# EAGLE board GP STM32F407.01 (EAGLE 7.1.0)
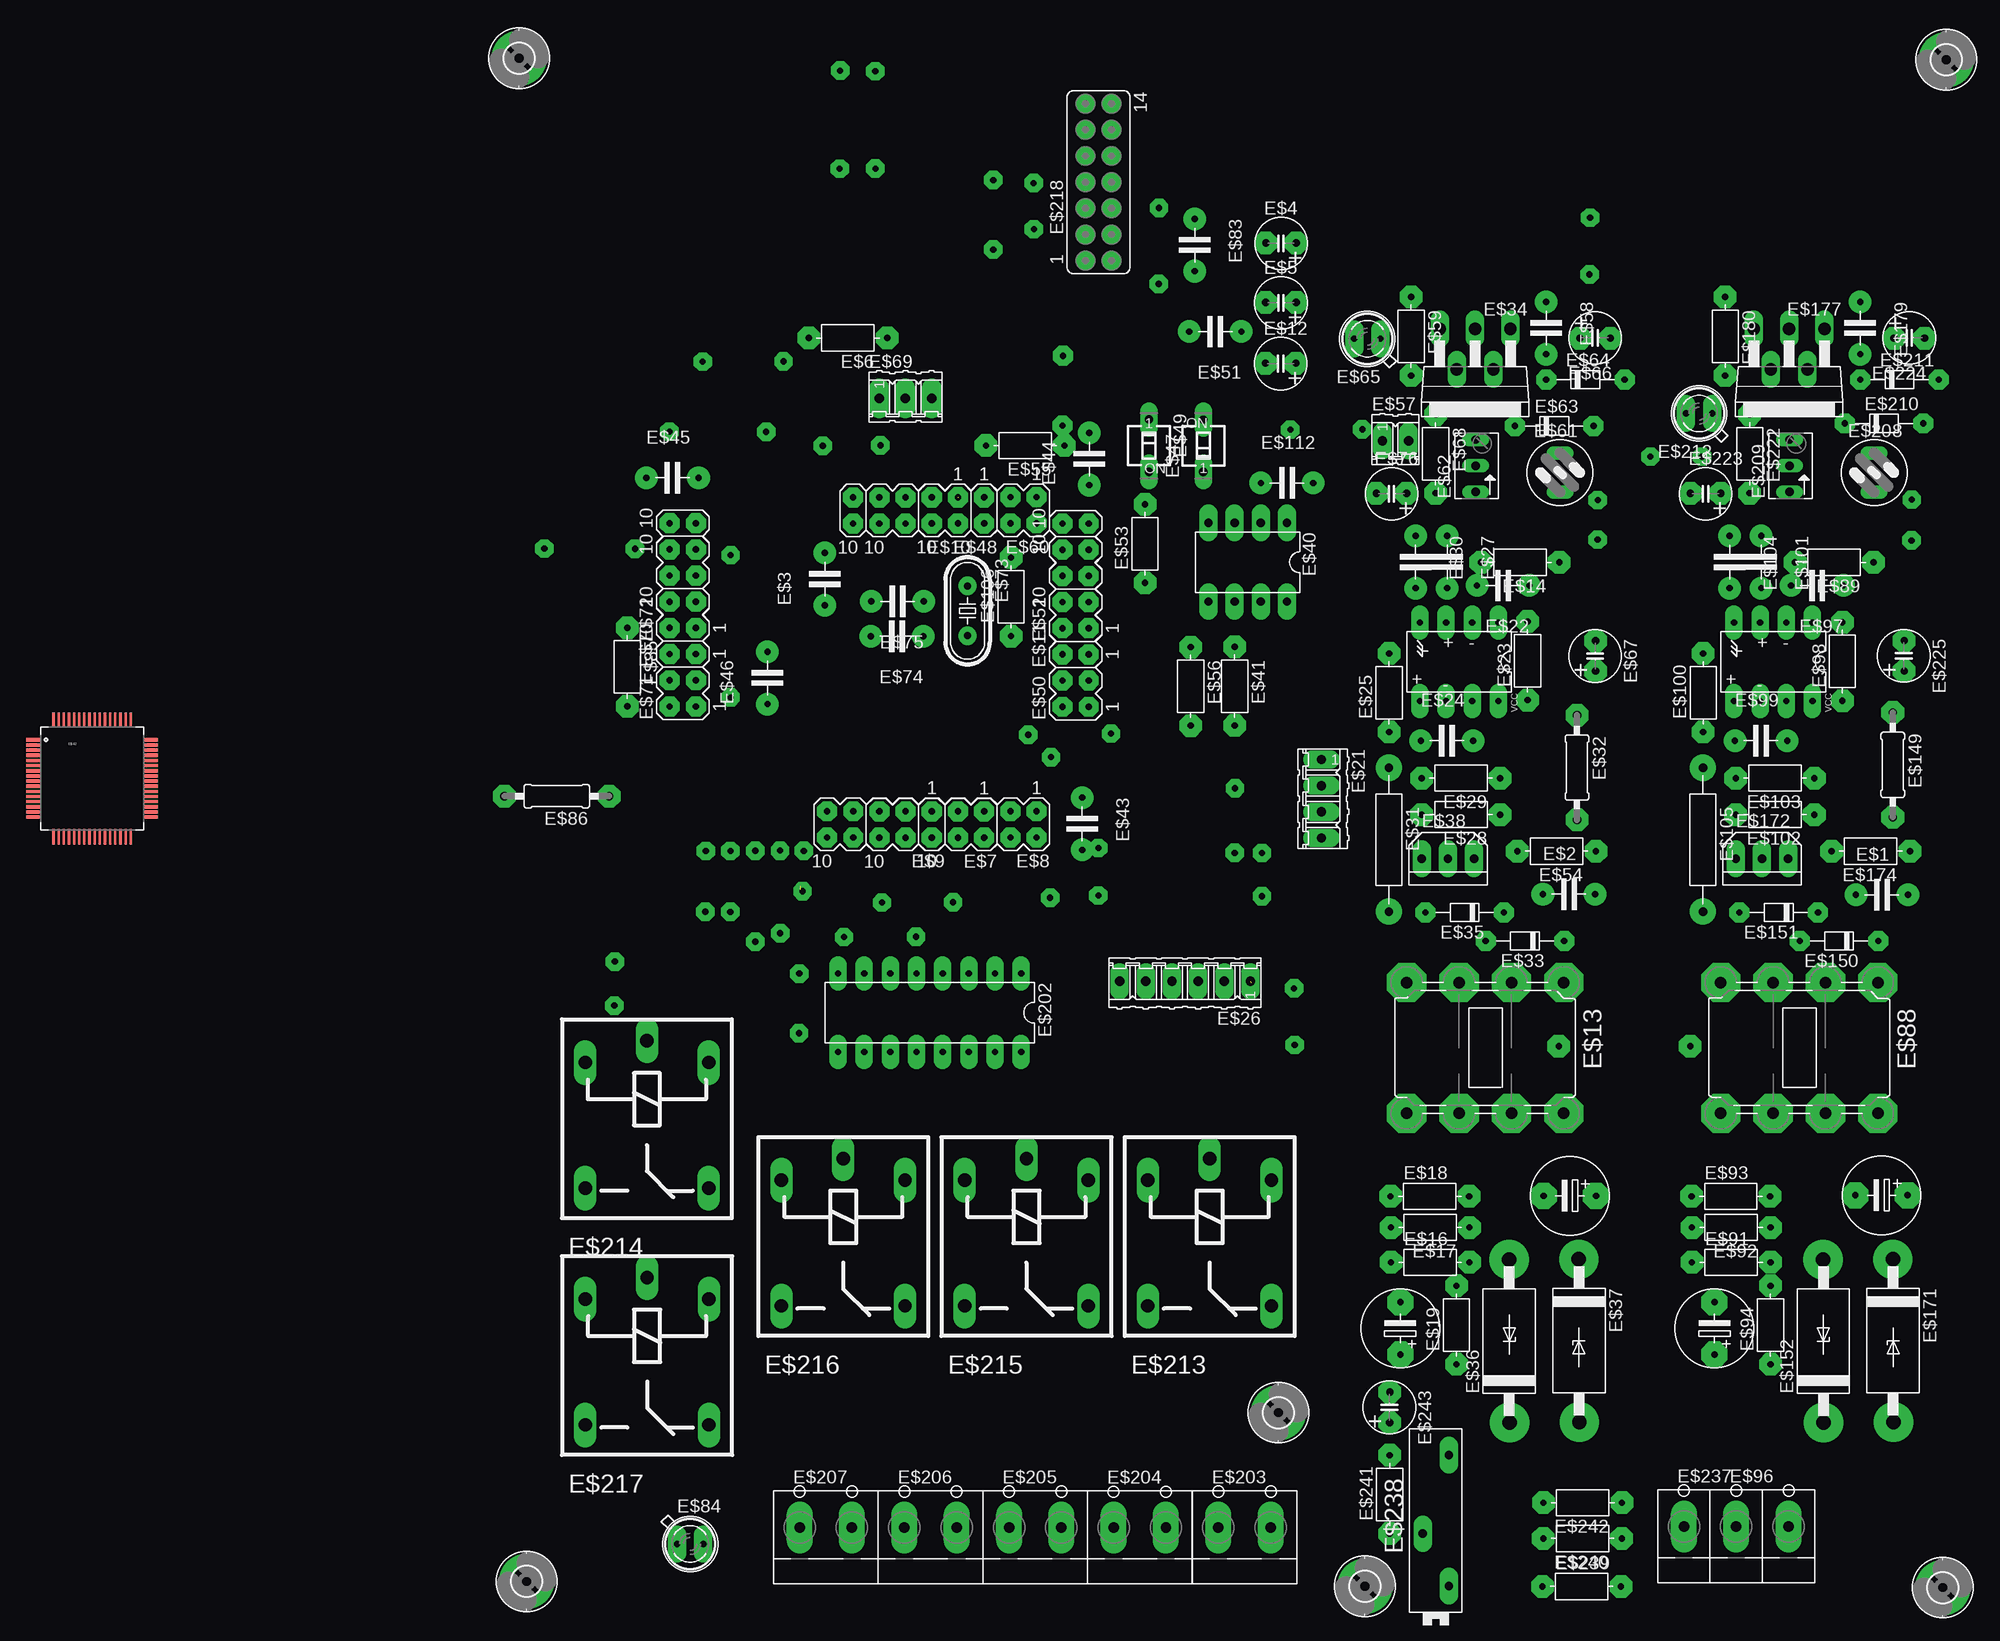
[diagram p0: board, top side]
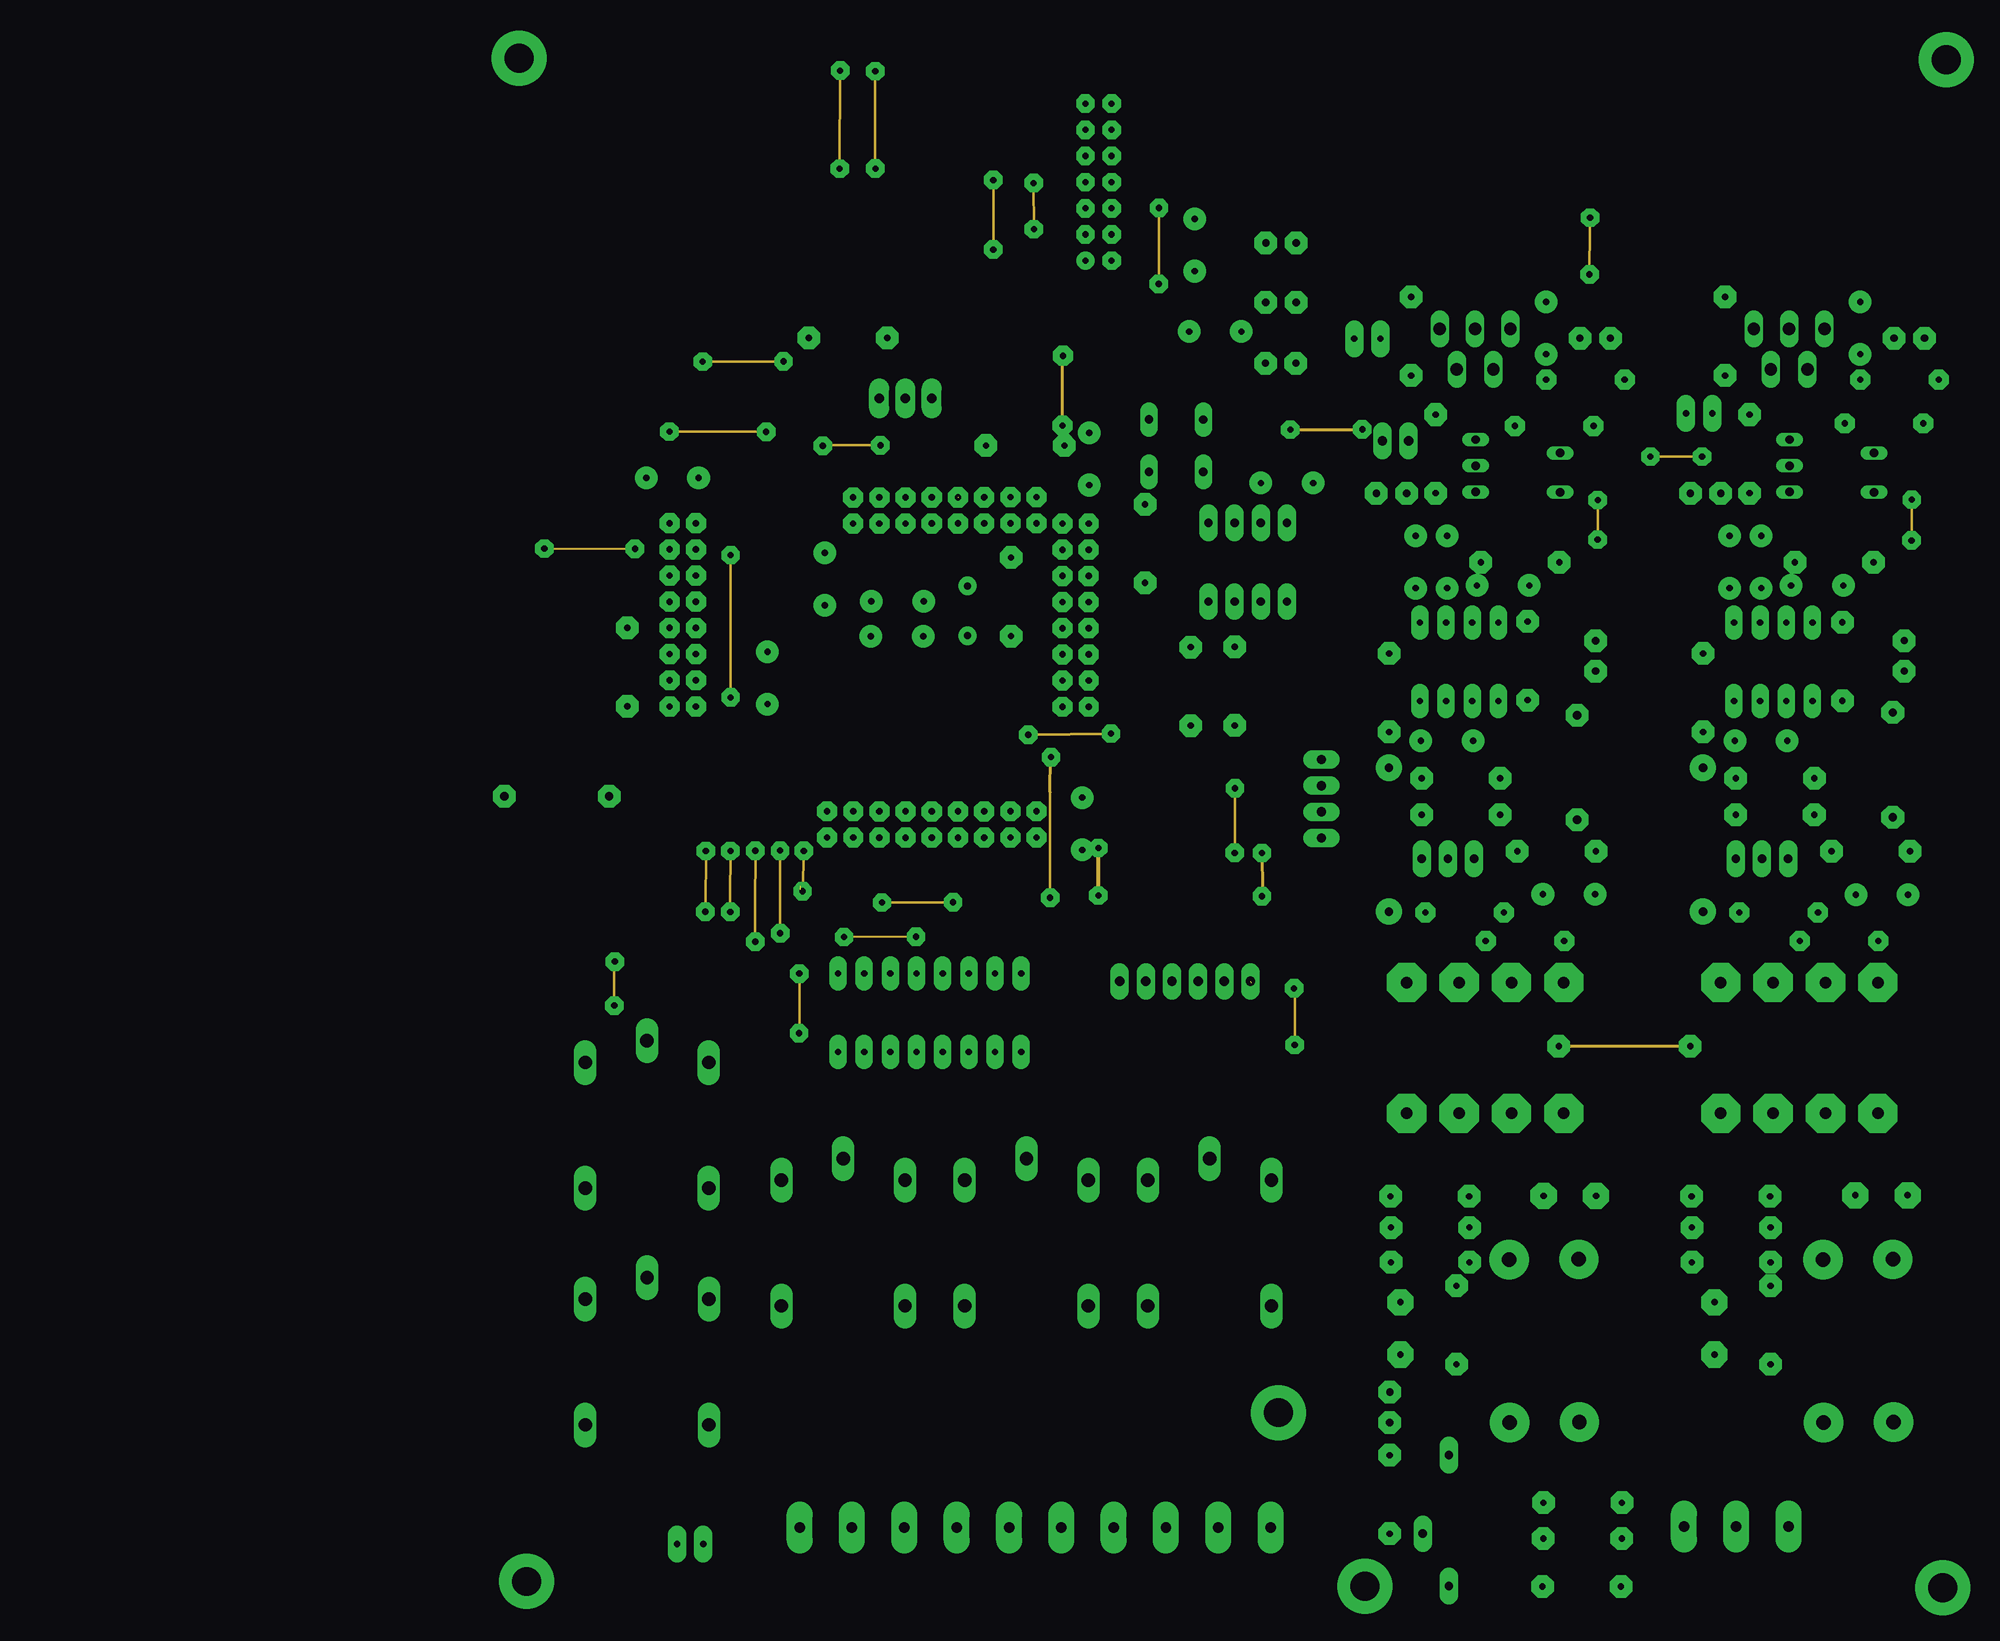
[diagram p1: board, inner layer Route4]
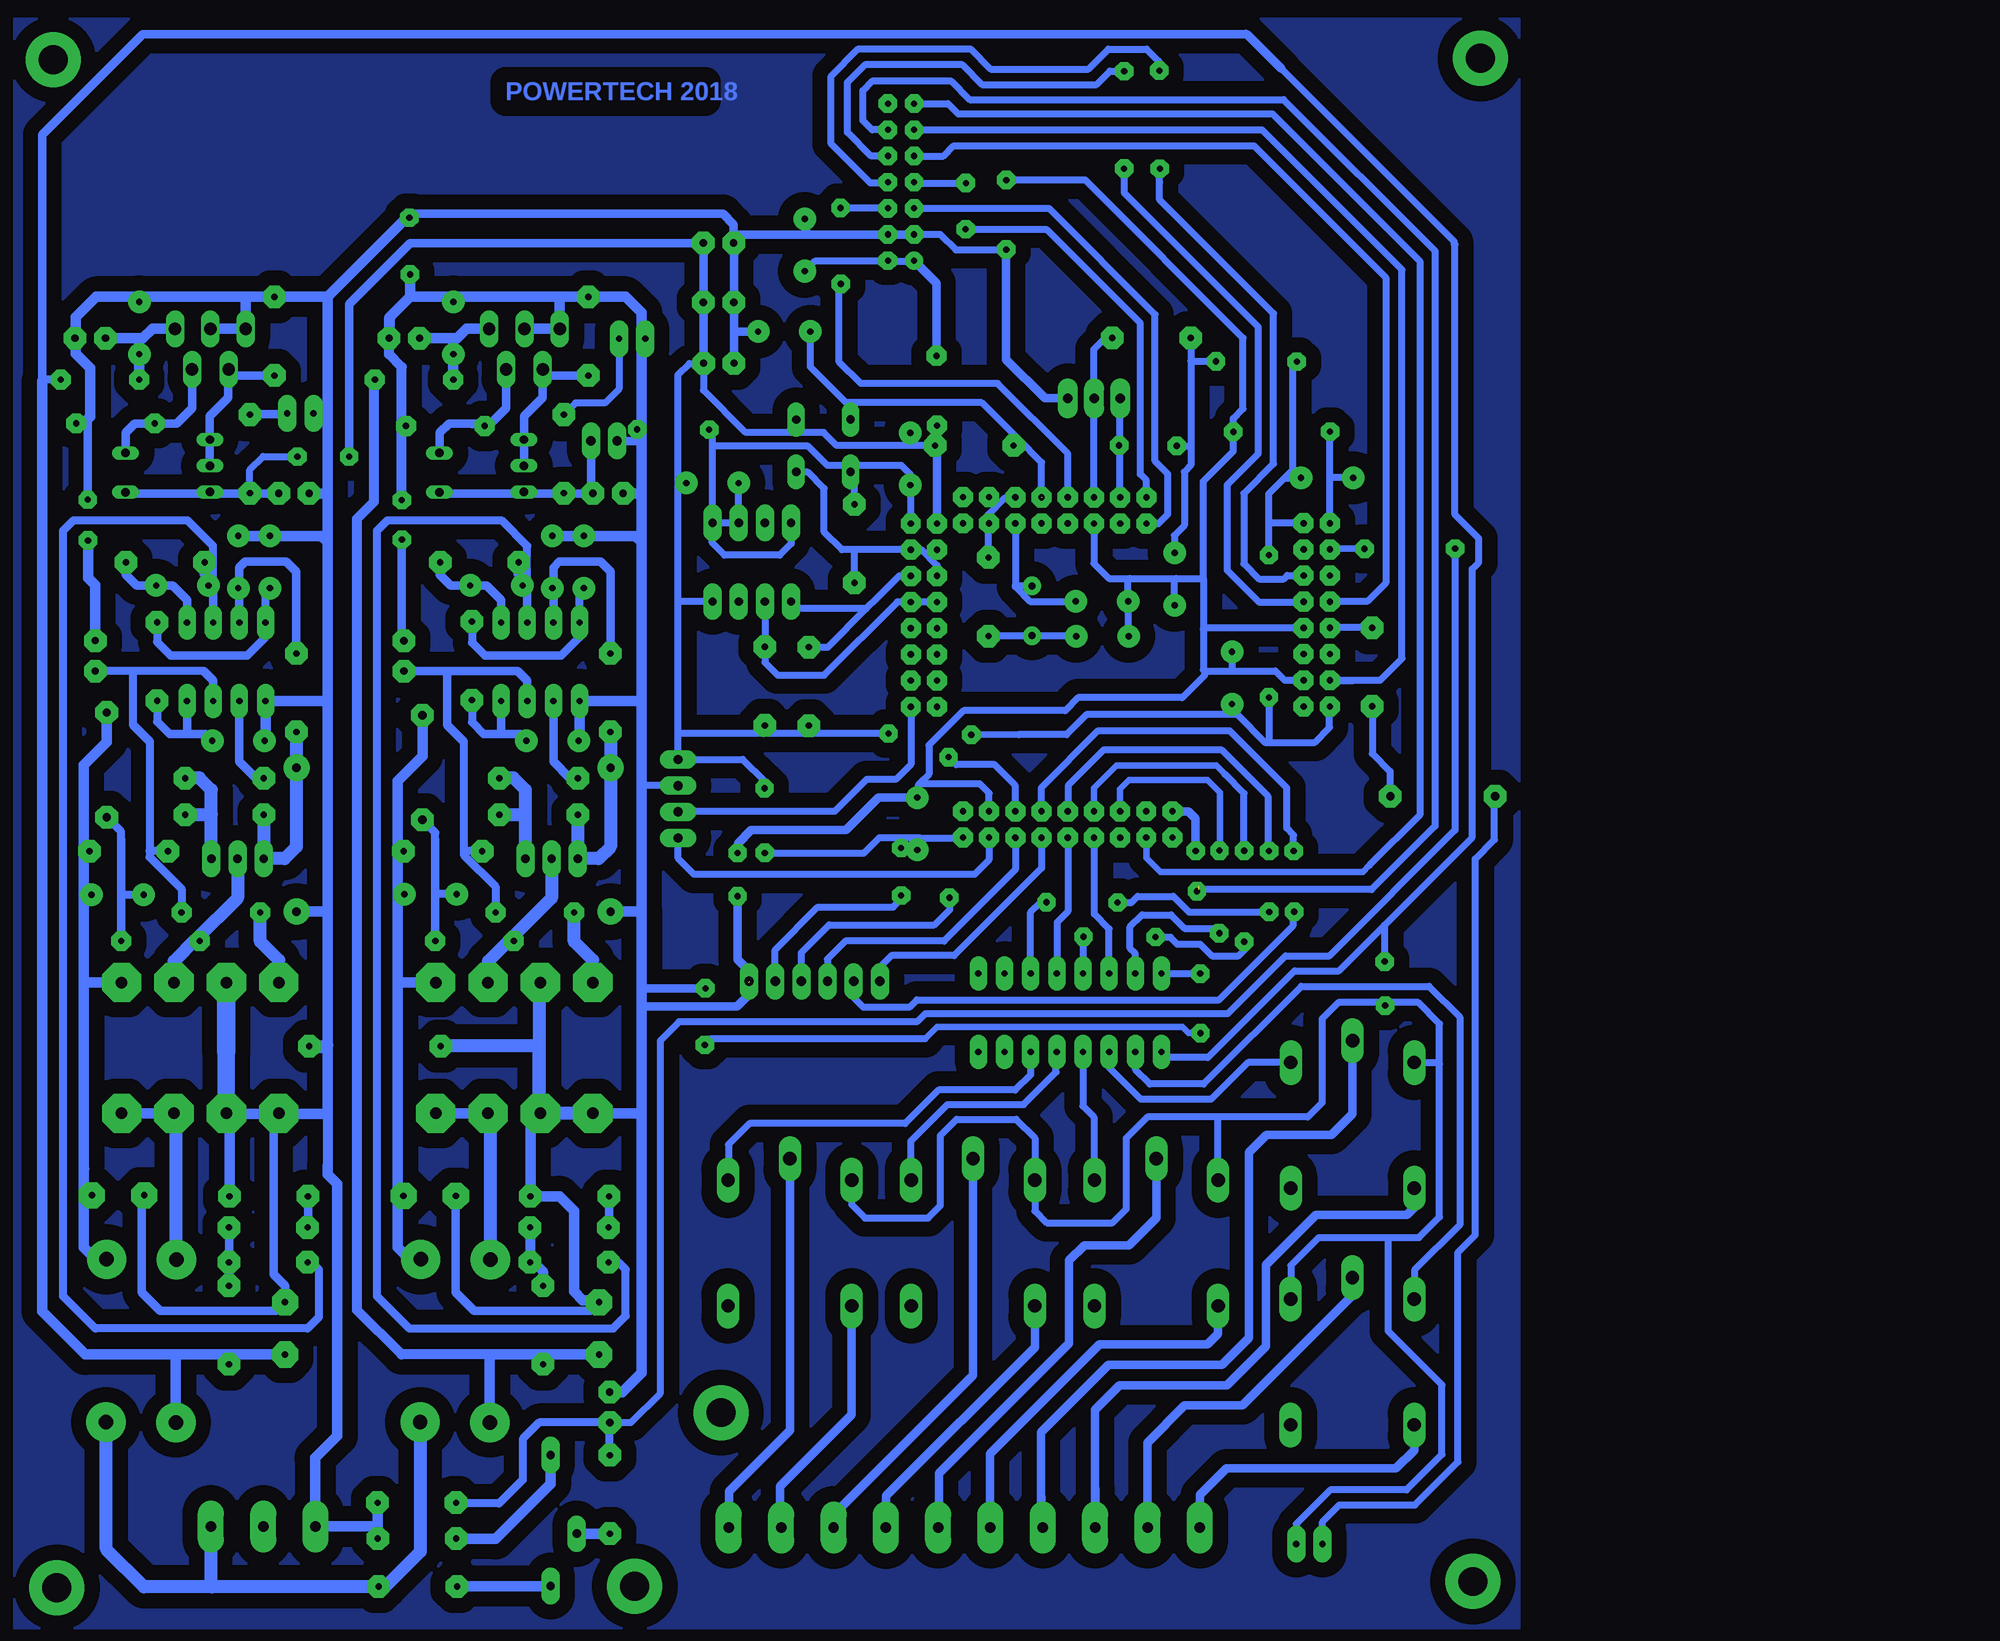
[diagram p2: board, bottom side, seen from below]

No outline drawn. Coordinates in mm, seen from the top.
Copper layers (1*16): Top 0.035mm / dielectric 1.5mm / Bottom 0.035mm
Design rules "default *": minimum track width 10mil, minimum drill 24mil, track to track 58mil, track to pad 58mil, pad to pad 58mil, via to via 58mil, smd to smd 80mil, copper to edge 40mil, drill to drill 8mil, minimum pad ring 10mil, minimum via ring 8mil, stop-mask expansion 4mil, vias tented up to drill 0mil, thermal gap 10mil

## Footprints (pad centres in the part's own frame; a part is rotated, then mirrored left to right if it is on the bottom)
C5 = drill 0.61 pad 2.184: P$4 2.54,0; P$5 -2.54,0
C2.5-2 = drill 0.7 pad 2.184 octagon: 1 -1.475,0.037; 2 1.475,0.035
R7-5 = drill 0.61 pad 2.184 octagon: 1 -3.81,0; 2 3.81,0
MA05-2 = drill 0.6 pad 1.93 octagon: 1 -5.08,-1.27; 2 -5.08,1.27; 3 -2.54,-1.27; 4 -2.54,1.27; 5 0,-1.27; 6 0,1.27; 7 2.54,-1.27; 8 2.54,1.27; 9 5.08,-1.27; 10 5.08,1.27
INDUCTOR_MEDIUM = drill 1.118 pad 3.81 octagon: 1 -2.54,-6.35; 2 -2.54,6.35; 3 2.54,-6.35; 4 2.54,6.35; 5 -7.62,-6.35; 6 -7.62,6.35; 7 7.62,-6.35; 8 7.62,6.35
DIL08 = drill 0.61 pad 1.676 long: 1 -3.81,-3.81; 2 -1.27,-3.81; 3 1.27,-3.81; 4 3.81,-3.81; 5 3.81,3.81; 6 1.27,3.81; 7 -1.27,3.81; 8 -3.81,3.81
ES-5 = drill 0.61 pad 2.54 octagon: 1 -2.54,0; 2 2.54,0
04P = drill 0.914 pad 1.778 long: 1 -3.81,0; 2 -1.27,0; 3 1.27,0; 4 3.81,0
06P = drill 0.914 pad 1.778 long: 1 -6.35,0; 2 -3.81,0; 3 -1.27,0; 4 1.27,0; 5 3.81,0; 6 6.35,0
R1_5W = drill 0.813 pad 2.54: P$3 -8.89,0; P$4 5.08,0
0207/10 = drill 0.813 pad 2.184 octagon: 1 -5.08,0; 2 5.08,0
D-5 = drill 0.61 pad 1.93 octagon: A 3.81,0; C -3.81,0
L200S = drill 1.194 long: 1 -3.429,-8.509; 2 -1.778,-4.572; 3 0,-8.509; 4 1.778,-4.572; 5 3.429,-8.509
CB429-17 = drill 1.397 pad 3.81: A 7.899,0.025; C -7.899,-0.025
TO92-BCE = drill 0.813 pad 1.778 long: B 2.54,0; C 0,0; E -2.54,0
AT24C512 = drill 0.813 pad 1.778 long: 1 -3.81,-3.81; 2 -1.27,-3.81; 3 1.27,-3.81; 4 3.81,-3.81; 5 3.81,3.81; 6 1.27,3.81; 7 -1.27,3.81; 8 -3.81,3.81
QFP50P1200X1200X160-64N = smd 1.47 x 0.28: 1 -5.67,3.75; 2 -5.67,3.25; 3 -5.67,2.75; 4 -5.67,2.25; 5 -5.67,1.75; 6 -5.67,1.25; 7 -5.67,0.75; 8 -5.67,0.25; 9 -5.67,-0.25; 10 -5.67,-0.75; 11 -5.67,-1.25; 12 -5.67,-1.75; 13 -5.67,-2.25; 14 -5.67,-2.75; 15 -5.67,-3.25; 16 -5.67,-3.75; 33 5.67,-3.75; 34 5.67,-3.25; 35 5.67,-2.75; 36 5.67,-2.25; 37 5.67,-1.75; 38 5.67,-1.25; 39 5.67,-0.75; 40 5.67,-0.25; 41 5.67,0.25; 42 5.67,0.75; 43 5.67,1.25; 44 5.67,1.75; 45 5.67,2.25; 46 5.67,2.75; 47 5.67,3.25; 48 5.67,3.75 | smd 0.28 x 1.47: 17 -3.75,-5.67; 18 -3.25,-5.67; 19 -2.75,-5.67; 20 -2.25,-5.67; 21 -1.75,-5.67; 22 -1.25,-5.67; 23 -0.75,-5.67; 24 -0.25,-5.67; 25 0.25,-5.67; 26 0.75,-5.67; 27 1.25,-5.67; 28 1.75,-5.67; 29 2.25,-5.67; 30 2.75,-5.67; 31 3.25,-5.67; 32 3.75,-5.67; 49 3.75,5.67; 50 3.25,5.67; 51 2.75,5.67; 52 2.25,5.67; 53 1.75,5.67; 54 1.25,5.67; 55 0.75,5.67; 56 0.25,5.67; 57 -0.25,5.67; 58 -0.75,5.67; 59 -1.25,5.67; 60 -1.75,5.67; 61 -2.25,5.67; 62 -2.75,5.67; 63 -3.25,5.67; 64 -3.75,5.67
SD4-01 = drill 0.813 pad 1.676 long: 1 0,-2.54; 2 0,2.54
02P = drill 0.914 pad 1.778 long: 1 -1.27,0; 2 1.27,0
82114R = drill 0.813 long: 1 0,1.905; 2 0,-1.905
B64Y = drill 0.813 long: A 2.54,0; E -2.54,0; S 0,0
SFH480 = drill 0.61 pad 1.778 long: A 1.27,0; K -1.27,0
03P = drill 0.914 pad 1.93 long: 1 -2.54,0; 2 0,0; 3 2.54,0
HC49/S = drill 0.7 pad 1.778: 1 -2.413,0; 2 2.413,0
2,8-PAD = drill 2.8 pad 5.334: B2,8 0,0
CONNECTOR-AWG-14-24 = drill 1.016 pad 2.54 long: P$2 -2.54,0; P$3 2.54,0
DIL16 = drill 0.61 pad 1.676 long: 1 -8.89,-3.81; 2 -6.35,-3.81; 3 -3.81,-3.81; 4 -1.27,-3.81; 5 1.27,-3.81; 6 3.81,-3.81; 7 6.35,-3.81; 8 8.89,-3.81; 9 8.89,3.81; 10 6.35,3.81; 11 3.81,3.81; 12 1.27,3.81; 13 -1.27,3.81; 14 -3.81,3.81; 15 -6.35,3.81; 16 -8.89,3.81
ZF112 = drill 1.3 pad 2.184 long: 1 -6.096,5.994; 2 -6.096,-5.994; O 6.096,5.994; P -8.204,0; S 6.096,-5.994
FE07-2 = drill 0.6 pad 1.778: 1 -7.62,1.27 | drill 0.6 pad 1.778 octagon: 2 -7.62,-1.27; 3 -5.08,1.27; 4 -5.08,-1.27; 5 -2.54,1.27; 6 -2.54,-1.27; 7 0,1.27; 8 0,-1.27; 9 2.54,1.27; 10 2.54,-1.27; 11 5.08,1.27; 12 5.08,-1.27; 13 7.62,1.27; 14 7.62,-1.27
PT-SPIN = drill 0.813 pad 1.778 long: A -6.35,-1.27; E 6.35,-1.27; S -1.27,1.27

## Placement (x,y rotation side)
E$1  [C5]  59.94,83.23 0 top
E$2  [C5]  29.57,83.29 0 top
E$3  [C5]  -42.64,113.87 90 top
E$4  [C2.5-2]  1.62,146.45 0 top
E$5  [C2.5-2]  1.61,140.69 0 top
E$6  [R7-5]  -40.41,137.28 180 top
E$7  [MA05-2]  -32.28,90.05 180 top
E$8  [MA05-2]  -27.19,90.07 180 top
E$9  [MA05-2]  -37.35,90.07 180 top
E$10  [MA05-2]  -34.82,120.53 180 top
E$11  [MA05-2]  -18.32,111.65 90 top
E$12  [C2.5-2]  1.59,134.78 0 top
E$13  [INDUCTOR_MEDIUM]  21.44,68.37 180 top
E$14  [R7-5]  24.82,115.49 180 top
E$15  [DIL08]  18.91,105.85 180 top
E$16  [R7-5]  16.1,47.57 0 top
E$17  [R7-5]  16.1,50.95 180 top
E$18  [R7-5]  16.06,53.97 0 top
E$19  [R7-5]  18.64,41.48 90 top
E$20  [ES-5]  29.64,54.02 180 top
E$21  [04P]  5.54,92.55 270 top
E$22  [C5]  23.17,113.25 180 top
E$23  [R7-5]  25.55,105.94 90 top
E$24  [C5]  17.72,98.19 0 top
E$25  [R7-5]  12.11,102.84 90 top
E$26  [06P]  -7.7,74.83 180 top
E$27  [C5]  17.74,115.53 270 top
E$28  [R7-5]  19.08,91.01 180 top
E$29  [R7-5]  19.08,94.55 180 top
E$30  [C5]  14.68,115.53 270 top
E$31  [R1_5W]  12.09,86.68 270 top
E$32  [0207/10]  30.34,95.59 270 top
E$33  [D-5]  25.3,78.75 180 top
E$34  [L200S]  20.45,129.66 180 top
E$35  [D-5]  19.43,81.51 180 top
E$36  [CB429-17]  23.77,39.92 90 top
E$37  [CB429-17]  30.54,39.96 270 top
E$38  [TO92-BCE]  17.82,86.74 0 top
E$39  [ES-5]  13.2,41.15 90 top
E$40  [AT24C512]  -1.62,115.51 180 top
E$41  [R7-5]  -2.88,103.48 270 top
E$42  [QFP50P1200X1200X160-64N]  -113.76,94.52 0 top
E$43  [C5]  -17.69,90.13 270 top
E$44  [C5]  -16.99,125.53 90 top
E$45  [C5]  -57.44,123.7 0 top
E$46  [C5]  -48.22,104.28 90 top
E$47  [SD4-01]  -5.92,126.81 0 top
E$48  [MA05-2]  -32.28,120.53 180 top
E$49  [SD4-01]  -11.19,126.82 180 top
E$50  [MA05-2]  -18.31,106.56 90 top
E$51  [C5]  -4.76,137.89 180 top
E$52  [MA05-2]  -18.31,114.18 90 top
E$53  [R7-5]  -11.58,117.31 90 top
E$54  [R7-5]  28.37,87.46 180 top
E$55  [R7-5]  -23.21,126.83 180 top
E$56  [R7-5]  -7.15,103.46 270 top
E$57  [02P]  12.73,127.29 0 top
E$58  [C5]  27.35,138.24 270 top
E$59  [R7-5]  14.25,137.44 270 top
E$60  [MA05-2]  -27.19,120.55 180 top
E$61  [82114R]  28.69,124.21 0 top
E$62  [B64Y]  20.5,124.87 90 top
E$63  [D-5]  28.13,128.74 0 top
E$64  [D-5]  31.16,133.23 0 top
E$65  [SFH480]  10,137.2 180 top
E$66  [C2.5-2]  32.11,137.28 180 top
E$67  [C2.5-2]  32.11,106.41 270 top
E$68  [R7-5]  16.62,126.02 270 top
E$69  [03P]  -34.83,131.41 0 top
E$70  [MA05-2]  -56.44,111.68 90 top
E$71  [MA05-2]  -56.43,106.59 90 top
E$72  [MA05-2]  -56.43,114.21 90 top
E$73  [HC49/S]  -28.8,110.79 270 top
E$74  [C5]  -35.64,108.33 180 top
E$75  [C5]  -35.59,111.7 180 top
E$76  [C2.5-2]  12.34,122.16 0 top
E$77  [2,8-PAD]  66.18,164.27 180 top
E$78  [2,8-PAD]  65.83,15.99 180 top
E$79  [2,8-PAD]  -71.59,16.59 180 top
E$80  [2,8-PAD]  -72.32,164.41 180 top
E$82  [2,8-PAD]  9.75,16.13 180 top
E$83  [C5]  -6.75,146.3 270 top
E$84  [SFH480]  -55.73,20.23 0 top
E$85  [R7-5]  -61.82,105.35 270 top
E$86  [0207/10]  -68.66,92.8 180 top
E$87  [2,8-PAD]  1.38,32.98 180 top
E$88  [INDUCTOR_MEDIUM]  51.92,68.37 180 top
E$89  [R7-5]  55.3,115.49 180 top
E$90  [DIL08]  49.39,105.85 180 top
E$91  [R7-5]  45.31,47.57 0 top
E$92  [R7-5]  45.31,50.95 180 top
E$93  [R7-5]  45.27,53.97 0 top
E$94  [R7-5]  49.12,41.48 90 top
E$95  [ES-5]  59.89,54.07 180 top
E$96  [CONNECTOR-AWG-14-24]  48.34,21.93 0 top
E$97  [C5]  53.65,113.25 180 top
E$98  [R7-5]  56.1,105.88 90 top
E$99  [C5]  48.2,98.19 0 top
E$100  [R7-5]  42.59,102.84 90 top
E$101  [C5]  48.22,115.53 270 top
E$102  [R7-5]  49.56,91.01 180 top
E$103  [R7-5]  49.56,94.55 180 top
E$104  [C5]  45.16,115.53 270 top
E$105  [R1_5W]  42.57,86.68 270 top
E$106  [R7-5]  -24.58,112.15 90 top
E$112  [C5]  2.21,123.2 0 top
E$149  [0207/10]  60.99,95.84 270 top
E$150  [D-5]  55.78,78.75 180 top
E$151  [D-5]  49.91,81.51 180 top
E$152  [CB429-17]  54.25,39.92 90 top
E$171  [CB429-17]  61.02,39.96 270 top
E$172  [TO92-BCE]  48.3,86.74 0 top
E$173  [ES-5]  43.68,41.15 90 top
E$174  [R7-5]  58.85,87.46 180 top
E$177  [L200S]  50.93,129.66 180 top
E$179  [C5]  57.83,138.24 270 top
E$180  [R7-5]  44.73,137.44 270 top
E$202  [DIL16]  -32.48,71.79 180 top
E$203  [CONNECTOR-AWG-14-24]  -1.92,21.84 0 top
E$204  [CONNECTOR-AWG-14-24]  -12.09,21.82 0 top
E$205  [CONNECTOR-AWG-14-24]  -22.24,21.84 0 top
E$206  [CONNECTOR-AWG-14-24]  -32.4,21.84 0 top
E$207  [CONNECTOR-AWG-14-24]  -42.56,21.84 0 top
E$208  [82114R]  59.17,124.21 0 top
E$209  [B64Y]  50.98,124.87 90 top
E$210  [D-5]  60.15,128.98 0 top
E$211  [D-5]  61.64,133.23 0 top
E$212  [SFH480]  42.2,129.94 180 top
E$213  [ZF112]  -5.3,49.43 270 top
E$214  [ZF112]  -59.91,60.86 270 top
E$215  [ZF112]  -23.08,49.43 270 top
E$216  [ZF112]  -40.86,49.43 270 top
E$217  [ZF112]  -59.9,37.88 270 top
E$218  [FE07-2]  -16.09,152.4 90 top
E$222  [R7-5]  47.1,126.02 270 top
E$223  [C2.5-2]  42.82,122.16 0 top
E$224  [C2.5-2]  62.59,137.28 180 top
E$225  [C2.5-2]  62.06,106.42 270 top
E$237  [CONNECTOR-AWG-14-24]  43.26,21.93 0 top
E$238  [PT-SPIN]  16.64,22.49 90 top
E$239  [R7-5]  30.8,16.1 0 top
E$240  [R7-5]  30.88,20.76 180 top
E$241  [R7-5]  12.17,25.03 90 top
E$242  [R7-5]  30.9,24.23 180 top
E$243  [C2.5-2]  12.14,33.49 270 top

## Library data of the parts
E$1-E$3 E$22 E$24 E$27 E$30 E$31 E$43-E$46 E$51 E$58 E$74 E$75 E$83 E$96 E$97 E$99 E$101 E$104 E$105 E$112 E$179 E$203-E$207 E$237 = PERSONAL1
E$4 E$5 E$12 E$66 E$67 E$76 E$223-E$225 E$243 = capacitor-wima
E$6 E$14 E$16-E$19 E$23 E$25 E$28 E$29 E$41 E$53-E$56 E$59 E$68 E$85 E$89 E$91-E$94 E$98 E$100 E$102 E$103 E$106 E$174 E$180 E$222 E$239-E$242 = PERSONAL
E$7-E$11 E$48 E$50 E$52 E$60 E$70-E$72 = con-lstb
E$13 E$88 = PERSONAL2
E$15 E$90 = PERSONAL3
E$20 E$39 E$95 E$173 = discrete
E$21 E$26 E$57 E$69 = con-amp-quick
E$32 E$86 E$149 = resistor
E$33 E$35-E$37 E$63 E$64 E$150-E$152 E$171 E$210 E$211 = diode
E$34 E$177 = v-reg
E$38 E$172 = transistor-npn
E$40 = atmel_AVR
E$42 = STM32F107RCT6
E$47 E$49 = switch-dil
E$61 E$208 = inductors
E$62 E$209 E$238 = pot
E$65 E$84 E$212 = led
E$73 = crystal
E$77-E$80 E$82 E$87 = holes
E$202 = ic-package
E$213-E$217 = relay
E$218 = con-lsta

## Nets
S$6: E$11.6 E$40.6 E$41.1
S$7: E$11.8 E$47.1 E$53.1
S$9: E$70.4 E$85.1
S$10: E$11.1
S$11: E$48.1 E$106.2
S$12: E$3.P$5 E$4.1 E$5.1 E$8.3 E$12.1 E$13.3 E$13.4 E$13.8 E$15.5 E$18.2 E$20.2 E$21.2 E$24.P$5 E$26.1 E$27.P$5 E$30.P$5 E$31.P$4 E$34.3 E$34.5 E$39.2 E$40.1 E$40.2 E$40.4 E$43.P$5 E$44.P$5 E$45.P$5 E$46.P$4 E$48.8 E$49.2 E$51.P$5 E$52.9 E$53.2 E$57.1 E$58.P$5 E$59.1 E$63.A E$65.A E$66.1 E$67.1 E$69.3 E$70.3 E$71.3 E$72.10 E$74.P$4 E$75.P$4 E$76.1 E$83.P$5 E$88.3 E$88.4 E$88.8 E$90.5 E$93.2 E$95.2 E$99.P$5 E$101.P$5 E$104.P$5 E$105.P$4 E$112.P$5 E$173.2 E$177.3 E$177.5 E$179.P$5 E$180.1 E$202.8 E$210.A E$212.A E$218.3 E$218.4 E$223.1 E$224.1 E$225.1 E$237.P$2 E$240.1 E$242.1 E$243.1
S$14: E$6.1 E$48.7 E$69.2
S$27: E$48.10
S$30: E$48.5 E$218.6
S$33: E$203.P$3 E$213.P
S$39: E$3.P$4 E$4.2 E$5.2 E$6.2 E$8.2 E$12.2 E$21.1 E$26.2 E$40.8 E$41.2 E$43.P$4 E$44.P$4 E$45.P$4 E$46.P$5 E$47.2 E$48.9 E$52.10 E$55.1 E$56.2 E$69.1 E$71.2 E$72.9 E$83.P$4 E$112.P$4 E$208.2 E$209.E E$218.1 E$218.2 E$222.2 E$223.2
S$41: E$202.10 E$217.2
S$43: E$21.3 E$50.1
S$44: E$85.2 E$86.1
S$50: E$7.4 E$26.6
S$55: E$73.2 E$74.P$5 E$106.1
S$56: E$48.6
S$57: E$11.7 E$40.5 E$56.1
S$59: E$60.3
S$60: E$84.K E$86.2
S$61: E$2.P$4 E$13.5 E$20.1 E$32.1 E$37.C E$54.1
S$63: E$48.2 E$73.1 E$75.P$5
S$65: E$70.10 E$241.2 E$242.2 E$243.2
S$66: E$60.1
S$67: E$48.3 E$49.1 E$51.P$4 E$55.2
S$96: E$60.4
S$97: E$70.9
S$128: E$70.6 E$218.9
S$133: E$15.3 E$25.2 E$27.P$4
S$134: E$15.4 E$23.2 E$30.P$4
S$135: E$15.8 E$23.1 E$24.P$4
S$136: E$15.6 E$29.2
S$139: E$28.1 E$29.1 E$38.B
S$145: E$17.2 E$18.1
S$150: E$16.2 E$17.1 E$19.2
S$151: E$14.1 E$15.1 E$22.P$5
S$153: E$14.2 E$15.2 E$16.1 E$22.P$4
S$155: E$13.2 E$13.6 E$36.A
S$156: E$25.1 E$28.2 E$31.P$3 E$38.E
S$157: E$2.P$5 E$32.2 E$33.C
S$158: E$13.1 E$33.A E$38.C
S$161: E$15.7 E$35.C E$54.2 E$67.2
S$163: E$13.7 E$35.A
S$164: E$1.P$4 E$88.5 E$95.1 E$149.1 E$171.C E$174.1
S$166: E$70.5 E$218.10
S$169: E$70.2
S$170: E$70.1
S$171: E$71.4 E$218.11
S$179: E$11.4
S$189: E$7.1 E$26.3
S$205: E$71.1
S$209: E$8.1
S$210: E$34.1 E$58.P$4 E$64.C E$66.2
S$211: E$34.4 E$59.2 E$62.A E$62.S
S$215: E$57.2 E$61.2 E$62.E E$68.2 E$76.2
S$217: E$34.2 E$61.1 E$63.C
S$224: E$65.K E$68.1
S$226: E$90.3 E$100.2 E$101.P$4
S$227: E$8.4 E$21.4
S$228: E$19.1 E$36.C E$39.1 E$64.A
S$231: E$7.7 E$202.5
S$234: E$7.8 E$202.6
S$235: E$7.10
S$236: E$7.5 E$202.3
S$238: E$7.9 E$202.7
S$239: E$90.4 E$98.2 E$104.P$4
S$240: E$90.8 E$98.1 E$99.P$4
S$241: E$90.6 E$103.2
S$242: E$7.3 E$26.5
S$243: E$7.6 E$202.4
S$247: E$102.1 E$103.1 E$172.B
S$251: E$9.10
S$253: E$7.2 E$26.4
S$266: E$92.2 E$93.1
S$267: E$91.2 E$92.1 E$94.2
S$268: E$89.1 E$90.1 E$97.P$5
S$269: E$89.2 E$90.2 E$91.1 E$97.P$4
S$270: E$88.2 E$88.6 E$152.A
S$271: E$100.1 E$102.2 E$105.P$3 E$172.E
S$272: E$1.P$5 E$149.2 E$150.C
S$278: E$88.1 E$150.A E$172.C
S$281: E$90.7 E$151.C E$174.2 E$225.2
S$301: E$88.7 E$151.A
S$325: E$202.11 E$214.1
S$326: E$202.12 E$216.1
S$332: E$202.14 E$213.1
S$333: E$202.13 E$215.1
S$334: E$203.P$2 E$213.S
S$335: E$204.P$2 E$215.S
S$336: E$205.P$2 E$216.S
S$337: E$205.P$3 E$216.P
S$338: E$207.P$2 E$217.S
S$341: E$204.P$3 E$215.P
S$342: E$207.P$3 E$217.P
S$345: E$206.P$2 E$214.S
S$354: E$177.1 E$179.P$4 E$211.C E$224.2
S$358: E$177.4 E$180.2 E$209.A E$209.S
S$365: E$9.8 E$218.13
S$368: E$9.9 E$218.12
S$370: E$70.7 E$218.8
S$373: E$10.9 E$218.7
S$374: E$10.10 E$218.5
S$375: E$177.2 E$208.1 E$210.C
S$378: E$206.P$3 E$214.P
S$381: E$212.K E$222.1
S$382: E$84.A E$202.9 E$211.A E$213.2 E$214.2 E$215.2 E$216.2 E$217.1
S$383: E$94.1 E$152.C E$173.1
S$390: E$37.A E$96.P$3 E$171.A E$239.2
S$392: E$238.A E$239.1
S$393: E$238.E E$240.2
S$394: E$238.S E$241.1

## Tracks (layer width: path | path; a pad name or v marks a point on that pad's centre or on a via)
S$6
  Bottom 0.686: E$11.6 -15.73,111.65 -8.64,104.55 -4.12,104.55 -2.88,105.78 -2.88,107.14 | E$40.6 -2.88,107.14 | E$41.1 -2.88,107.15 -2.88,107.14
S$7
  Bottom 0.686: E$11.8 -19.59,115.2 -18.07,116.72 -11.63,116.72 | -11.63,116.72 -10.37,116.72 -8.63,118.46 -8.63,122.67 -7.05,124.25 -5.95,124.25 E$47.1 | E$53.1 -11.58,116.67 -11.63,116.72
S$9
  Bottom 0.686: E$85.1 -57.73,109.16 E$70.4
S$11
  Bottom 0.686: E$106.2 -24.58,120.15 -26.2,121.78 -27.18,121.78 E$48.1
S$12  (via drill 0.6 pad 1.78, 0.6 pad 2.18)  (1 unrouted)
  Route4 0.254: v-26.3,145.85 v-26.3,145.86 v-26.3,152.6 | v-57.73,128.19 -48.75,128.19 | v32.34,117.7 32.34,121.33 v32.35,121.54 | v62.81,117.62 62.82,121.33 v62.83,121.58 | v31.55,143.45 31.59,147.99 v31.62,148.94 | v-45.12,75.58 -45.12,69.84 v-45.16,69.81 | v2.94,68.66 2.94,74.1 v2.89,74.16
  Route4 0.305: v-0.24,83.08 -0.2,83.7 v-0.23,87.29 | -48.75,128.19 v-48.35,128.15 | v2.52,128.37 9.47,128.4 v9.51,128.4 | v28.57,68.54 v41.33,68.54
  Bottom 0.61: v-45.16,69.81 -44.01,69.81 -43.4,70.42 -19.6,70.42 -18.43,69.25 | 8.9,74.16 9.08,73.98 | 9.02,72.39 9.08,72.33
  Bottom 0.686: E$83.P$5 -6.75,147.72 -6.95,147.52 | -17.37,147.31 E$218.3 -19.91,147.32 -21.41,145.82 -26.27,145.82 v-26.3,145.85 | E$45.P$5 -57.78,123.7 -57.7,123.78 | E$8.3 -24.65,93.1 -23.74,94 -17.92,94 -17.91,94.01 | E$72.10 -57.7,123.78 | -57.7,123.78 -57.7,128.16 v-57.73,128.19 | v-26.3,152.6 -33.97,152.6 -49.3,137.28 -49.3,130.4 -48.35,129.45 | E$43.P$5 -17.76,92.74 -17.76,93.86 -17.91,94.01 | -17.91,94.01 -18.81,94.92 -18.81,97.76 -22.16,101.11 -32.04,101.11 -33.28,102.35 -43.38,102.35 -45.55,104.51 -45.55,104.97 | E$74.P$4 -38.13,108.38 E$75.P$4 -38.13,113.81 -38.27,113.94 | E$48.8 -34.82,115.4 -36.27,113.94 -38.27,113.94 | v-48.35,128.15 -48.35,129.45 | -48.35,129.45 -48.34,129.44 -48.34,126.29 -45.43,123.38 -45.43,113.94 | E$3.P$5 -42.64,113.77 -42.82,113.94 | -38.27,113.94 -42.82,113.94 | -42.82,113.94 -45.43,113.94 | -45.43,113.94 -45.43,109.02 | -45.43,109.02 -45.43,105.09 -45.55,104.97 | E$46.P$4 -48.22,105.18 -48.43,104.97 | -45.55,104.97 -48.43,104.97 | -48.43,104.97 -52.41,104.97 -53.32,104.06 -55.15,104.06 E$71.3 | 33.6,139.19 33.58,139.19 | E$21.2 9.01,93.82 9.08,93.76 | v9.51,128.4 9.19,128.42 9.08,128.31 | E$202.8 -45.11,75.6 v-45.12,75.58 | -18.43,69.25 2.36,69.25 v2.94,68.66 | E$44.P$5 -16.99,124.05 | -16.99,124.05 -16.13,124.9 -11.62,124.9 | -11.62,124.9 -8.95,124.9 -7.08,126.77 2.17,126.77 2.19,126.8 | E$53.2 -11.58,124.34 | -11.58,124.34 -11.58,124.86 -11.62,124.9 | E$49.2 -11.52,124.28 -11.58,124.34 | E$52.9 -17.04,124 -16.99,124.05 | E$70.3 -45.55,109.14 -45.43,109.02 | E$40.4 -5.42,117.3 -4.33,116.2 1.03,116.2 2.23,117.39 2.23,119.28 E$40.1 | E$112.P$5 -0.34,123.19 E$40.2 E$40.1
  Bottom 0.686: E$40.1 2.19,126.8 | 2.19,126.8 2.19,128.04 v2.52,128.37
  Bottom 0.813: -1.29,74.67 -1.29,75.89 -0.24,76.94 v-0.24,83.08 | -6.95,147.52 -7.15,147.32 E$218.4 | E$218.3 E$218.4 | v-0.23,87.29 -0.27,87.32 -0.27,88.23 -1.56,89.53 -10.77,89.53 -13.9,92.67 E$43.P$5 | E$69.3 -32.28,131.42 -30.04,131.42 -26.3,135.16 v-26.3,145.86 | E$20.2 27.1,44.64 25.32,42.85 14.04,42.85 E$39.2 | v32.35,117.71 32.35,108.09 E$67.1 | 44.79,61.53 44.79,46.39 43.68,45.28 E$173.2 44.52,42.85 55.8,42.85 57.58,44.64 57.58,53.84 E$95.2 | 62.83,117.83 v62.81,117.62 | v62.83,121.58 62.83,129.4 | E$212.A 39.57,129.94 39.56,129.93 | E$57.1 9.34,127.28 9.08,127.55 | v2.89,74.16 8.9,74.16 | E$26.1 -1.34,73.54 -0.19,72.39 9.02,72.39 | 0.14,147.21 0.14,148.28 1.2,149.33 31.51,149.33 | 0.14,147.21 E$4.1 0.11,146.45 0.11,140.79 | E$237.P$2 | E$218.4 0.03,147.32 0.14,147.21 | 31.51,149.06 v31.62,148.94 | E$12.1 0.11,137.83 | 0.11,137.83 0.11,140.79 | E$5.1 0.14,140.77 0.11,140.79 | E$51.P$5 0.05,137.89 0.11,137.83
  Bottom 0.965: v32.35,121.54 32.35,128.6 | 32.35,128.6 32.35,134.44 33.6,135.69 33.6,139.19 33.08,139.72 | E$63.A 32.22,128.74 32.35,128.6 | 39.56,61.91 39.56,56.91
  Bottom 1.016: E$24.P$5 15.1,98.28 E$15.5 9.22,102.04 9.08,102.19 | 9.08,81.66 9.08,93.76 9.08,102.19 | E$30.P$5 E$27.P$5 | E$30.P$5 | E$31.P$4 9.13,81.6 9.08,81.66 | E$13.8 13.77,61.98 13.77,61.99 13.8,62.02 | E$34.3 E$34.5 17.02,141.19 16.94,141.28 | 16.94,141.28 14.4,141.28 14.37,141.25 E$59.1 | 16.94,141.28 27.41,141.28 | 27.41,141.28 31.52,141.28 31.52,141.27 | 33.52,137.25 33.52,139.27 33.08,139.72 31.52,141.27 | E$66.1 33.52,137.25 | 33.52,137.25 | E$58.P$5 27.35,141.22 27.41,141.28 | 9.08,102.19 9.08,117.44 | 9.08,117.44 9.08,122.53 | E$76.1 9.41,122.19 9.08,122.53 | E$30.P$5 9.7,118.06 9.08,117.44 | 9.08,122.53 9.08,127.55 9.08,128.31 9.08,137.32 | E$65.A 8.96,137.2 9.08,137.32 | 9.08,81.66 9.08,73.98 9.08,72.33 9.08,62.02 | 9.08,62.02 9.08,36.81 10.97,34.92 12.13,34.92 E$243.1 | E$13.4 E$13.8 | E$13.8 13.8,62.02 | 13.8,62.02 9.08,62.02 | E$13.4 19.86,61.05 E$18.2 17.04,53.97 15.64,52.57 15.64,44.73 14.81,43.9 13.4,43.9 E$39.2 | E$13.3 E$13.4 | 9.08,137.32 9.08,139.71 10.64,141.27 31.52,141.27 | 32.35,117.83 v32.35,117.71 v32.34,117.7 | E$99.P$5 45.58,98.28 E$90.5 39.7,102.04 39.56,102.19 | 39.56,81.66 39.56,61.91 39.62,61.98 44.51,61.98 | 39.56,81.66 39.56,102.19 | E$104.P$5 E$101.P$5 | E$104.P$5 | E$105.P$4 39.62,81.6 39.56,81.66 | E$93.2 49.08,61.72 E$88.4 49.33,61.98 44.88,61.98 | E$177.3 E$177.5 47.51,141.19 47.42,141.28 | 44.88,141.28 39.57,141.28 39.56,141.29 | 44.88,141.28 47.42,141.28 | E$180.1 44.85,141.25 44.88,141.28 | 47.42,141.28 57.89,141.28 | 57.89,141.28 61.99,141.28 64,139.27 64,137.25 | 64,137.25 64,135.74 62.59,134.33 62.59,129.64 62.83,129.4 63.25,128.97 63.95,128.97 E$210.A | E$224.1 64,137.25
  Bottom 1.016: 64,137.25 | E$179.P$5 57.83,141.22 57.89,141.28 | 39.56,102.19 39.56,117.44 | 39.56,117.44 39.56,122.53 | E$223.1 39.89,122.19 39.56,122.53 | E$104.P$5 40.17,118.06 39.56,117.44 | 39.56,122.53 39.56,129.93 39.56,141.29 | 44.51,61.98 44.88,61.98 | E$88.8 44.46,62.02 44.51,61.98 | 44.79,61.53 44.79,61.89 44.88,61.98 | E$225.1 62.1,113.3 62.79,113.98 62.79,117.59 v62.81,117.62 | 39.56,56.91 39.56,56.09 38.62,55.15 38.62,30.72 40.78,28.57 40.78,21.99 E$237.P$2 34.72,21.93 34.71,21.92 | E$242.1 34.71,21.92 | 34.71,21.92 34.71,20.77 E$240.1 | 31.51,149.33 39.56,141.29 | v31.55,143.45 31.55,141.3 31.52,141.27
  Bottom 1.27: E$13.8 18.84,62.02 19.05,62.23 19.05,68.58 | 49.35,68.04 49.38,68.01 | 49.27,70.22 49.38,70.33 | 19.05,74.93 19.05,68.58 | 19.05,68.58 28.53,68.58 v28.57,68.54 | v41.33,68.54 39.74,68.54 39.63,68.65
  Bottom 1.676: 49.38,68.01 E$88.4
  Bottom 1.778: E$88.3 49.38,70.33 49.38,68.01
S$14
  Bottom 0.686: E$48.7 -34.82,131.57 | E$69.2 -34.83,131.56 -34.82,131.57 | -34.82,131.57 -34.82,136.18 -35.89,137.25 -36.58,137.25 E$6.1
S$30  (via drill 0.6 pad 1.78)
  Route4 0.254: v-10.22,149.88 -10.22,143.05 v-10.25,142.52
  Bottom 0.686: E$218.6 -10.25,149.86 v-10.22,149.88 | -10.27,142.5 v-10.25,142.52 -10.1,142.37 -10.1,134.95 -12.2,132.85 -25.48,132.85 -32.28,126.05 E$48.5
  Bottom 0.813: -10.17,142.44 v-10.25,142.52
S$33
  Bottom 0.813: E$213.P -5.3,31.24 0.58,25.35 0.58,21.89 E$203.P$3
S$39  (via drill 0.6 pad 1.78, 0.6 pad 1.93)
  Route4 0.254: v-22.91,98.76 -22.78,98.78 | v-51.79,116.19 v-51.79,102.39 | v42.49,125.75 v37.47,125.75 v37.47,125.76 | v-2.87,87.3 -2.85,92.76 v-2.85,93.57 | v-46.66,135 -54.11,135
  Route4 0.305: -22.78,98.78 v-14.88,98.88 | v-37.26,126.86 v-42.86,126.81 v-42.85,126.8 | -54.11,135 v-54.5,134.98 | v-19.59,128.76 -19.59,135.5 v-19.55,135.54
  Route4 0.406: v-16.11,83.17 -16.11,87.77
  Route4 0.686: -16.11,87.77 v-16.1,87.78
  Bottom 0.61: -17.91,88.76 -17.92,88.77
  Bottom 0.686: v-51.79,116.19 -51.79,119.15 | -51.79,119.15 -51.79,122.17 -53.3,123.67 | -53.3,123.67 -54.88,123.67 E$45.P$4 | E$72.9 -51.93,119.29 -51.79,119.15 | E$222.2 47.1,124.49 45.82,125.77 42.5,125.77 v42.49,125.75 | 3.08,134.28 3.08,134.8 E$12.2 3.08,134.8 4.45,134.8 5.54,133.7 5.54,123.05 | 3.08,134.28 3.08,132.2 -1.02,128.1 -5.83,128.1 | -17.63,88.77 -17.92,88.77 -22.07,88.77 E$8.2 | E$43.P$4 -17.68,88.71 -17.63,88.77 | -53.3,123.67 -54.13,124.51 -54.13,134.61 v-54.5,134.98 | -48.01,100.75 -34.14,100.75 -32.17,98.78 -27.5,98.78 v-22.91,98.76 | -48.01,100.75 -48.67,100.75 -51.39,98.03 -52.02,98.03 | -52.02,98.03 -56.25,98.03 -57.69,99.47 -57.69,101.5 E$71.2 | v-51.79,102.39 -51.79,98.26 -52.02,98.03 | E$46.P$5 -48.22,100.96 -48.01,100.75 | -46.79,134.87 v-46.66,135 -44.26,135 -44.22,135.04 | -17.63,88.77 -16.31,88.77 | -16.31,88.77 -13.98,88.77 -12.46,87.25 -2.92,87.25 v-2.87,87.3 | E$6.2 -44.22,135.04 | -44.22,135.04 -44.22,126.84 | -44.22,126.84 -44.22,124.91 -43.58,124.27 -43.58,119.07 -42.61,118.1 -42.61,116.45 E$3.P$4 | E$48.9 -37.36,126.82 | v-37.26,126.86 -37.33,126.86 -37.36,126.82 | v-42.85,126.8 -44.17,126.8 -44.22,126.84 | -37.36,126.82 E$69.1 | E$26.2 -3.88,77.9 -8.02,82.03 -15.34,82.03 -16.11,82.81 -16.11,83.31 v-16.11,83.17 | v-16.1,87.78 -16.1,88.55 -16.31,88.77 | v-2.85,93.57 v-2.84,93.58 -2.84,94.26 -0.74,96.36 E$21.1 5.54,99.01 | E$218.2 -14.74,144.78 -14.68,144.71 | -14.68,144.71 -17.3,144.71 E$218.1 | 3.08,134.28 | -16.95,126.83 E$55.1 -19.58,126.83 -19.58,126.84 | -16.95,126.83 -9.85,126.83 -8.59,128.1 -5.83,128.1 | E$47.2 -6.09,128.35 -5.83,128.1 | E$44.P$4 -16.99,126.87 -16.95,126.83
  Bottom 0.686: v-14.88,98.88 -7.43,98.88 | -7.43,98.88 -2.77,98.88 | E$56.2 -7.15,99.16 -7.43,98.88 | E$41.2 -2.88,98.98 -2.77,98.88 | -14.68,144.71 -7.71,144.71 E$83.P$4 | 5.54,99.01 5.54,111.5 | 5.54,111.5 5.54,123.05 | E$112.P$4 5.4,123.2 5.54,123.05 | E$40.8 5.35,111.7 5.54,111.5 | -2.77,98.88 5.41,98.88 5.54,99.01
  Bottom 0.813: E$223.2 47.04,122.19 | 47.04,122.19 51.26,122.19 | 51.26,122.19 59.06,122.19 E$208.2 | E$209.E 51.11,122.33 51.26,122.19 | E$222.2 47.07,122.21 47.04,122.19 | v37.47,125.76 37.47,140.57 31.55,146.49 E$4.2 3.06,146.45 3.06,140.85 | E$12.2 3.06,140.85 | E$5.2 3.08,140.82 3.06,140.85 | E$218.2 | E$52.10 -19.58,126.84 v-19.58,128.76 v-19.59,128.76 | v-19.55,135.54 -19.55,142.59 E$218.1
S$41
  Bottom 0.686: E$202.10 -38.86,67.95 -38.86,66.25 -40.25,64.86 -45.46,64.86 -54.95,74.35 -67.34,74.35 -70.31,71.37 -70.31,51.19 -65.93,46.81 -65.93,44.02 E$217.2
S$43
  Bottom 0.686: E$21.3 5.5,91.33 -9.64,91.33 -12.76,94.44 -15.6,94.44 -17.04,95.89 E$50.1
S$44
  Bottom 0.686: E$85.2 -61.83,96.93 -63.55,95.21 -63.55,92.83 E$86.1
S$50
  Bottom 0.686: E$7.4 -29.74,85.83 -21.25,77.34 -15.16,77.34 -14.1,76.27 -14.1,74.88 E$26.6
S$55
  Bottom 0.686: E$74.P$5 -28.73,108.33 | -28.73,108.33 E$106.1 | E$73.2 -28.78,108.38 -28.73,108.33
S$57
  Bottom 0.686: E$11.7 -15.91,114.19 -13.76,112.03 -12.72,110.99 | -12.72,110.99 -6.13,110.99 E$40.5 | E$56.1 -9,107.27 -12.72,110.99
S$60
  Bottom 0.686: E$84.K -57,22.38 -58.63,24.02 -65.97,24.02 -70.15,28.19 -70.15,48.54 -71.83,50.22 -71.83,86.73 -73.69,88.59 -73.69,92.75 E$86.2
S$61
  Bottom 0.762: E$2.P$4 32.75,83.3 32.75,83.29
  Bottom 0.813: E$54.1 32.46,87.46 32.75,87.17
  Bottom 1.016: E$32.1 30.34,96.69 32.75,94.27 32.75,87.17 32.75,83.29 32.75,74.65 | E$13.5 32.68,74.72 32.75,74.65 | E$20.1 32.66,54.02 32.75,53.93 | 32.75,74.65 32.75,53.93 | 32.75,53.93 32.75,49.01 31.6,47.85 30.53,47.85 E$37.C
S$63
  Bottom 0.686: E$48.2 -27.2,113.26 | -27.2,113.26 -27.2,113.13 -28.62,111.7 E$75.P$5 | E$73.1 -27.25,113.21 -27.2,113.26
S$65  (via drill 0.6 pad 1.78)
  Route4 0.254: v-69.86,116.84 v-61.09,116.81
  Route4 0.305: v-61.09,116.81 v-61.08,116.81
  Bottom 0.61: v-61.08,116.81 -57.77,116.81 E$70.10
  Bottom 0.686: E$243.2 10.1,32.02 7.26,34.86 7.26,69.08 5.44,70.89 -17.64,70.89 -18.46,71.71 -47.8,71.71 -53.41,77.31 -57.68,77.31 -69.86,89.5 v-69.86,116.84
  Bottom 0.762: E$242.2 27.03,24.16 22.91,24.16 20.61,26.45 20.61,30.43 19.02,32.02 E$243.2 E$241.2
S$67  (1 unrouted)
  Bottom 0.686: E$51.P$4 -7.3,134.45 -10.77,130.98 -11.23,130.98 | E$49.1 -11.2,130.94 -11.23,130.98 | -11.23,130.98 -23.94,130.98 -27.49,127.44 | -29.73,121.81 -29.73,125.19 -27.49,127.44 | -27.08,126.83 -27.08,127.03 -27.49,127.44
  Bottom 0.813: E$51.P$4 -7.3,137.27 | E$55.2 -27.08,126.83
S$87
  pour Bottom: -76.09,168.24 69.96,168.24 69.96,12.03 -76.09,12.03
S$128
  Bottom 0.686: E$218.9 -20.21,154.94 -21.2,155.92 -50.35,155.92 -63.13,143.14 -63.13,113.5 -61.33,111.71 -57.74,111.71 E$70.6
S$133
  Bottom 0.813: E$25.2 12.11,114.61 13.07,115.57 17.07,115.57 17.64,115 17.64,113.09 | E$15.3 17.64,113.09 | E$27.P$4 17.76,112.96 17.64,113.09
S$134
  Bottom 0.762: 16.89,106.44 15.1,108.24 E$15.4 15.1,112.58 E$30.P$4 | E$23.2 25.55,107.71 24.28,106.44
  Bottom 0.813: 16.89,106.44 24.28,106.44
S$135
  Bottom 0.762: E$23.1 25.55,99.98 24.39,98.82
  Bottom 0.813: 22.73,98.82 20.89,98.82 E$24.P$4 | E$15.8 22.72,98.83 22.73,98.82 | 22.73,98.82 24.39,98.82
S$136
  Bottom 0.813: E$15.6 17.64,96.14 16.05,94.56 E$29.2
S$139
  Bottom 1.27: E$38.B 20.36,91.07 | 20.36,91.07 20.36,93.41 21.52,94.57 22.88,94.57 E$29.1 | E$28.1 20.41,91.01 20.36,91.07
S$145
  Bottom 0.813: E$18.1 12.24,50.99 E$17.2
S$150
  Bottom 0.965: E$17.1 19.91,47.95 19.7,47.74 | 19.7,47.74 18.65,46.69 E$19.2 | E$16.2 19.87,47.57 19.7,47.74
S$151
  Bottom 0.813: E$15.1 22.72,111.84 24.12,113.25 E$22.P$5 27.61,113.25 28.67,114.3 28.67,115.46 E$14.1
S$153
  Bottom 0.762: 20.18,113.42 21.12,114.36 21.12,115.2 21.01,115.31 | E$15.2 20.18,117.09 22.68,119.59 33.73,119.59 34.77,118.54 34.77,44.29 31.62,41.14 11.83,41.14 10.61,42.36 10.61,46.87 11.29,47.55 12.27,47.55 E$16.1
  Bottom 0.813: E$15.2 20.18,113.11 | 20.18,113.11 20.18,113.42 | E$22.P$4 20.31,113.25 20.18,113.11 | 21.01,115.31 E$14.2 20.96,115.54
S$155
  Bottom 1.016: E$13.2 E$13.6
  Bottom 1.27: E$36.A 23.75,61.79 E$13.2
S$156
  Bottom 0.813: E$31.P$3 12.09,95.5 12.11,95.48
  Bottom 1.27: E$25.1 12.11,95.48 12.11,87.89 13.26,86.74 E$38.E | E$38.E | E$28.2 E$38.E
S$157
  Bottom 0.762: E$2.P$5 29.03,83.3 29.11,83.22 | 29.11,88.58 29.11,89.27 E$32.2
  Bottom 0.813: E$33.C 29.11,83.22 29.11,88.58
S$158
  Bottom 1.27: E$38.C 17.82,82.92 21.86,78.88 | 21.86,78.88 23.97,76.77 E$13.1 | E$33.A 21.73,78.75 21.86,78.88
S$161
  Bottom 0.762: 26.34,98.1 26.34,87.58 | 26.34,87.58 26.34,87.11 23.26,84.04 23.26,81.53 E$35.C | E$54.2 26.22,87.46 26.34,87.58
  Bottom 0.813: E$15.7 20.18,104.01 21.11,104.94 27.94,104.94 | 26.34,98.1 27.93,99.69 27.93,104.93 27.94,104.94 | 27.94,104.94 E$67.2
S$163
  Bottom 1.27: E$13.7 13.82,76.89 15.61,78.68 E$35.A
S$164
  Bottom 0.762: E$1.P$4 63.22,83.23 63.23,83.21
  Bottom 0.813: E$174.1 62.94,87.46 63.23,87.17 | 63.11,95.71 63.23,95.84 | 63.07,56.65 63.23,56.49 | E$95.1 63.17,54.07 63.23,54.13
  Bottom 1.016: E$88.5 63.16,74.72 63.23,74.65 | 63.23,74.65 63.23,83.21 63.23,87.17 63.23,95.84 60.99,98.08 E$149.1 | 63.23,74.65 63.23,56.49 63.23,54.13 63.23,49.01 62.08,47.85 61.01,47.85 E$171.C
S$166  (via drill 0.6 pad 1.78)
  Route4 0.254: v-37.76,163.16 -37.77,153.3 v-37.74,153.72
  Bottom 0.686: E$218.10 -13.19,154.94 -10.9,157.23 -10.9,162.07 -12.66,163.84 -22,163.84 -23.97,161.86 -35.05,161.86 -36.35,163.16 v-37.76,163.16 | E$70.5 -55.14,111.65 -50.83,111.65 -47.75,114.72 -47.75,123 -50.77,126.03 -50.77,138.34 -37.74,151.37 v-37.74,153.72
S$171
  Bottom 0.686: E$71.4 -58.43,104.05 | -58.43,104.05 -59.98,104.05 | E$218.11 -51.12,157.48 -64.71,143.88 -64.71,106.18 -62.58,104.05 -58.44,104.05 -58.43,104.05
S$189  (via drill 0.6 pad 1.78)
  Route4 0.254: v-20.79,82.94 -20.79,93.19
  Route4 0.305: -20.79,93.19 -20.75,96.62 -20.89,96.57 v-20.7,96.59
  Bottom 0.686: E$26.3 -6.42,77.62 -9.11,80.31 -19.34,80.31 -20.83,81.8 -20.83,83.4 v-20.79,82.94 | E$7.1 -27.2,93.84 -25.18,95.85 -21.45,95.85 v-20.7,96.59
S$210
  Bottom 1.016: E$66.2 27.49,137.25 | 27.49,137.25 27,137.25 26.07,138.19 23.9,138.19 E$34.1 | E$64.C 27.35,135.74 | 27.35,135.74 27.35,137.11 27.49,137.25 | E$58.P$4 27.35,135.73 27.35,135.74
S$211
  Bottom 0.813: 18.7,133.24 18.7,131.47 20.5,129.66 E$62.A E$62.S | 18.7,133.24 18.7,134.2 E$34.4 | E$59.2 18.32,133.63 18.7,133.24
S$215
  Bottom 0.813: 16.56,122.19 E$76.2 14,122.37 E$57.2 | 16.56,122.19 20.78,122.19 | 20.78,122.19 28.58,122.19 E$61.2 | E$62.E 20.63,122.33 20.78,122.19 | E$68.2 16.59,122.21 16.56,122.19
S$217
  Bottom 0.813: E$34.2 22.23,130.47 23.71,128.98 25.89,128.98 | 25.89,128.98 27.78,128.98 28.67,128.09 28.67,126.14 E$61.1 | E$63.C 25.88,128.98 25.89,128.98
S$224
  Bottom 0.686: E$65.K 11.27,132.32 12.64,130.95 15.51,130.95 E$68.1
S$226
  Bottom 0.813: E$100.2 42.59,114.61 43.55,115.57 47.55,115.57 48.12,115 48.12,113.09 | E$90.3 48.12,113.09 | E$101.P$4 48.24,112.96 48.12,113.09
S$227
  Bottom 0.686: E$21.4 5.54,86.77 4,85.22 -23.23,85.22 -24.63,86.62 -24.63,88.79 E$8.4
S$228
  Bottom 0.965: 23.85,38.61 32.39,38.61 36.7,42.93 36.7,119.73 35.05,121.39 35.05,133.16 E$64.A
  Bottom 1.016: E$36.C 23.83,32.05 23.83,38.59 23.85,38.61 18.73,38.61 | E$19.1 18.64,38.53 18.73,38.61 | E$39.1 18.73,38.61
S$231  (via drill 0.6 pad 1.78)
  Route4 0.254: v-49.4,87.51 -49.41,81.99 v-49.4,78.67 | v-40.79,79.13 -33.88,79.17 v-33.8,79.17
  Bottom 0.61: E$7.7 -34.82,93.59 -37.01,95.79 -46.69,95.79 -47.53,94.95 -48.78,93.69
  Bottom 0.686: v-33.8,79.17 -33.78,79.15 -33.78,75.63 E$202.5 | -40.81,79.11 v-40.79,79.13 -40.83,79.09 -42.26,79.09 -42.92,78.44 -45.14,78.44 -46.32,77.25 -48.78,77.25 -49.4,77.87 v-49.4,78.67 | v-49.4,87.51 -49.4,93.08 -47.53,94.95
S$234
  Bottom 0.686: E$202.6 -36.29,79.92 -34.86,81.35 -34.86,88.74 E$7.8
S$236  (via drill 0.6 pad 1.78)
  Route4 0.254: v-30.21,82.51 -36.78,82.51 v-37.11,82.48 | v-51.82,81.58 -51.82,82.82 v-51.81,87.49
  Bottom 0.686: v-51.81,87.49 -51.69,87.61 -51.69,92.81 -47.17,97.32 -35.8,97.32 -32.3,93.82 -32.3,91.34 E$7.5 | E$202.3 -28.67,81.54 -29.63,82.51 v-30.21,82.51 | v-30.21,82.51 | v-37.11,82.48 -38.45,82.48 -39.06,83.09 -42.51,83.09 -44.05,81.56 -51.8,81.56 v-51.82,81.58
S$238  (via drill 0.6 pad 1.78)
  Route4 0.254: v-47,87.52 -47,81.99 v-46.98,79.5
  Bottom 0.61: E$7.9 -37.36,93.48 -38.24,94.36 -45.84,94.36 -47.02,93.18 -47.02,87.55 v-47,87.52
  Bottom 0.686: E$202.7 -38.83,77.53 -38.33,78.03 -38.33,80.14 -39.48,81.28 -42.3,81.28 -43.6,79.98 -46.51,79.98 v-46.98,79.5
S$239
  Bottom 0.762: 47.37,106.44 45.58,108.24 E$90.4 45.58,112.58 E$104.P$4 | E$98.2 56.1,107.78 54.76,106.44
  Bottom 0.813: 47.37,106.44 54.76,106.44
S$240
  Bottom 0.762: E$98.1 56.1,100.04 54.87,98.82
  Bottom 0.813: 53.21,98.82 51.37,98.82 E$99.P$4 | E$90.8 53.2,98.83 53.21,98.82 | 53.21,98.82 54.87,98.82
S$241
  Bottom 0.813: E$90.6 48.12,96.14 46.53,94.56 E$103.2
S$242  (via drill 0.6 pad 1.78)
  Route4 0.254: v-54.2,87.48 -54.22,81.97 v-54.25,81.59
  Bottom 0.686: E$7.3 -29.74,93.67 -35.23,99.16 -47.99,99.16 -53.53,93.62 -53.53,89.69 -54.2,89.02 v-54.2,87.48 | E$26.5 -11.46,74.79 -11.46,73.29 -12.44,72.32 -16.91,72.32 -17.64,73.05 -46.95,73.05 -54.18,80.27 -54.18,81.51 v-54.25,81.59
S$243
  Bottom 0.686: E$7.6 -32.28,81.61 -31.24,80.57 -31.24,75.63 E$202.4
S$247
  Bottom 1.27: E$172.B 50.84,91.07 | 50.84,91.07 50.84,93.41 52,94.57 53.36,94.57 E$103.1 | E$102.1 50.9,91.01 50.84,91.07
S$253
  Bottom 0.686: E$7.2 -27.2,85.68 -20.27,78.75 -10.7,78.75 -8.95,77 -8.95,74.84 E$26.4
S$266
  Bottom 0.813: E$93.1 41.45,50.99 E$92.2
S$267
  Bottom 0.813: E$92.1 E$91.2 | E$91.2 E$94.2 | E$91.2 | E$91.2
S$268
  Bottom 0.813: E$90.1 53.2,111.84 54.6,113.25 E$97.P$5 58.09,113.25 59.15,114.3 59.15,115.46 E$89.1
S$269
  Bottom 0.762: 50.66,113.42 51.6,114.36 51.6,115.2 51.49,115.31 | E$90.2 50.66,117.09 53.16,119.59 64.21,119.59 65.25,118.54 65.25,44.29 62.1,41.14 41.51,41.14 40.41,42.24 40.41,46.87 41.08,47.54 41.52,47.54
  Bottom 0.813: E$90.2 50.66,113.11 | 50.66,113.11 50.66,113.42 | E$97.P$4 50.79,113.25 50.66,113.11 | 51.49,115.31 E$89.2 51.45,115.54 | 41.52,47.54 E$91.1
S$270
  Bottom 1.016: E$88.2 E$88.6
  Bottom 1.27: E$152.A 54.23,61.79 E$88.2
S$271
  Bottom 1.016: E$105.P$3 42.57,95.72 42.59,95.73
  Bottom 1.27: E$100.1 42.59,95.73 42.59,87.89 43.74,86.74 E$172.E | E$172.E | E$102.2 E$172.E
S$272
  Bottom 0.762: E$1.P$5 59.52,83.23 59.59,83.29 | 59.59,88.58 59.59,89.36 E$149.2
  Bottom 0.813: E$150.C 59.59,83.29 59.59,88.58
S$278
  Bottom 1.27: E$172.C 48.3,82.92 52.34,78.88 | 52.34,78.88 54.45,76.77 E$88.1 | E$150.A 52.21,78.75 52.34,78.88
S$281
  Bottom 0.762: 56.82,98.1 56.82,87.49 | 56.82,87.49 56.82,86.89 53.74,83.8 53.74,81.52 E$151.C | E$174.2 56.8,87.46 56.82,87.49 | 58.41,99.69 58.41,104.84 58.51,104.94 | 51.59,104.94 58.51,104.94 | 58.51,104.94 61.91,104.94 E$225.2
  Bottom 0.813: E$90.7 50.66,104.01 51.59,104.94 | 58.41,99.69 56.82,98.1
S$301
  Bottom 1.27: E$88.7 44.3,76.89 46.09,78.68 E$151.A
S$325
  Bottom 0.686: E$214.1 -49.76,66.96 -46.19,63.39 -39.38,63.39 -36.28,66.49 -36.28,67.97 E$202.11
  Bottom 0.813: E$214.1
S$326
  Bottom 0.686: E$202.12 -33.75,62.72 -34.81,61.66 -34.81,55.59 E$216.1
S$332
  Bottom 0.686: E$213.1 0.66,55.56 0.66,59 -1.38,61.04 -16.5,61.04 -19.74,64.28 -27.17,64.28 -28.67,65.77 E$202.14
S$333
  Bottom 0.686: E$215.1 -17.03,55.59 -17.03,59.32 -20.6,62.89 -27.99,62.89 -31.14,66.04 -31.14,67.91 E$202.13
S$334
  Bottom 0.813: E$213.S -11.3,32.78 -4.36,25.84 -4.36,21.94 E$203.P$2
S$335
  Bottom 0.813: E$215.S -29.08,39.3 -14.66,24.88 -14.66,21.86 E$204.P$2
S$336
  Bottom 0.813: E$216.S -46.86,40.62 -45.83,39.59 -35.33,39.59 -24.72,28.97 -24.72,22.34 -24.71,22.34 | -24.71,23.4 -24.71,22.34 | -24.71,22.34 -24.71,21.9 E$205.P$2
S$337
  Bottom 0.813: E$216.P -40.86,51.87 -38.22,49.22 -33.88,49.22 -32.4,47.74 -32.4,39.71 -19.77,27.08 -19.77,21.91 E$205.P$3
S$338
  Bottom 0.813: E$217.S -65.89,29.34 -64.1,27.55 -47.66,27.55 -45.11,25 E$207.P$2
S$341
  Bottom 0.813: E$215.P -23.08,36.6 -9.44,22.96 -9.44,21.93 E$204.P$3
S$342
  Bottom 0.813: E$217.P -59.87,46.06 -59.87,44.33 -49.21,33.66 -43.59,33.66 -40,30.07 -40,21.86 E$207.P$3
S$345
  Bottom 0.813: -34.97,25.58 -34.97,22.4 | -34.97,22.4 -34.97,21.87 E$206.P$2 | E$214.S -65.91,52.91 -65.17,52.17 -56.38,52.17 -51.51,47.3 -51.51,39.43 -47.72,35.64 -37.3,35.64 -34.93,33.27 -34.93,22.44 -34.97,22.4
S$354
  Bottom 1.016: E$224.2 57.97,137.25 | 57.97,137.25 57.48,137.25 56.55,138.19 54.38,138.19 E$177.1 | E$211.C 57.83,135.74 | 57.83,135.74 57.83,137.11 57.97,137.25 | E$179.P$4 57.83,135.73 57.83,135.74
S$358
  Bottom 0.813: 49.18,133.24 49.18,131.47 50.98,129.66 E$209.A E$209.S | 49.18,133.24 49.18,134.2 E$177.4 | E$180.2 48.8,133.63 49.18,133.24
S$365
  Bottom 0.61: -65.75,90.29 -61.57,86.11 -60.9,85.44 -41.28,85.44 -39.9,86.81 -39.9,88.79 E$9.8
  Bottom 0.686: -61.57,86.11 -66.44,90.97 -66.44,144.75 -52.16,159.02 -21.64,159.02 -20.65,160.02 E$218.13
S$368  (via drill 0.6 pad 1.78)  (1 unrouted)
  Route4 0.254: v-44.69,87.49 -44.8,83.58 v-44.81,83.57
  Bottom 0.61: -44.99,84.07 -44.98,84.08
  Bottom 0.686: E$218.12 -13.29,157.48 -12.39,158.38 -12.39,161.27 -13.35,162.23 -20.94,162.23 -22.76,160.42 -53.22,160.42 -67.92,145.72 -67.92,89.89 -61.77,83.75 -44.99,83.75 v-44.81,83.57
  Bottom 0.813: v-44.69,87.49 -44.69,90.61 -43.97,91.33 E$9.9
S$370  (via drill 0.6 pad 1.78)
  Route4 0.254: v-41.21,153.7 -41.16,163.25 v-41.16,163.22
  Bottom 0.686: E$218.8 -14.74,152.32 -13.1,152.32 -9.31,156.11 -9.31,162.7 -11.94,165.33 -22.82,165.33 -24.79,163.35 -34.27,163.35 -36.23,165.31 -39.92,165.31 -41.1,164.13 -41.1,163.29 v-41.16,163.22 | E$70.7 -53.59,114.22 -53.25,113.88 -50.85,113.88 -49.35,115.37 -49.35,122.17 -52.24,125.06 -52.24,139.64 -41.19,150.69 -41.19,152.37 v-41.21,153.7
S$373  (via drill 0.6 pad 1.78)
  Route4 0.254: v-22.36,147.83 v-22.39,152.3 v-22.39,152.31
  Bottom 0.61: -17.47,152.28 E$218.7
  Bottom 0.686: -17.47,152.28 -22.5,152.28 -22.4,152.39 v-22.39,152.31 | E$10.9 -39.9,123.46 -39.32,124.04 -39.32,138.71 -30.2,147.83 v-22.36,147.83
S$374
  Bottom 0.686: E$218.5 -30.44,149.86 -40.74,139.55 -40.74,125.33 -41.97,124.1 -41.97,120.14 -41.07,119.24 -39.92,119.24 E$10.10
S$375
  Bottom 0.813: E$177.2 52.71,130.47 54.2,128.98 56.37,128.98 | 56.37,128.98 58.26,128.98 59.15,128.09 59.15,126.14 E$208.1 | E$210.C 56.36,128.98 56.37,128.98
S$378
  Bottom 0.813: E$214.P -59.91,61.98 -57.88,59.94 -51.56,59.94 -49.86,58.24 -49.86,40.24 -47.23,37.61 -36.23,37.61 -29.67,31.06 -29.67,22.02 E$206.P$3 -29.71,21.98 -29.71,24.8
S$381
  Bottom 0.813: E$222.1 46.53,129.87 43.54,129.87 E$212.K
S$382  (via drill 0.6 pad 1.78)
  Route4 0.254: v-63.08,72.48 -63.08,76.7
  Route4 0.305: -63.08,76.7 v-63.03,76.75
  Bottom 0.406: E$214.2 -68.31,66.96 -68.34,66.99 -68.34,70.71 -66.36,72.69 -63.29,72.69 v-63.08,72.48
  Bottom 0.686: E$202.9 -41.91,67.44 -45.87,67.44 -54.29,75.86 -58.58,75.86 -62.99,80.27 | -62.99,80.27 -71.53,88.81 -71.53,114.86 -72.16,115.48 -72.16,117.81 -69.86,120.11 -69.86,146.38 -69.78,146.38 -69.78,146.63 -53.03,163.38 -49.53,166.88 | E$213.2 -11.3,53.17 -12.59,51.87 -18.72,51.87 -19.91,53.07 -19.91,59.88 -21.49,61.45 -27.26,61.45 -29.08,59.63 -29.08,55.36 | -29.08,55.36 -29.08,52.54 -30.21,51.41 -36.63,51.41 -37.96,52.74 -37.96,59.63 -40,61.67 -46.88,61.67 | E$215.2 -29.08,55.37 -29.08,55.36 | E$217.1 -53.92,44 -53.92,47.24 -56.66,49.97 -63.37,49.97 | -63.37,49.97 -66.36,49.97 -68.36,51.97 -68.36,66.79 | E$214.2 -68.18,66.96 -68.36,66.79 | -68.36,66.79 -68.36,70.71 -66.29,72.78 -58.53,72.78 -56.95,71.19 -56.95,63.04 -55.58,61.67 -46.88,61.67 | E$216.2 -46.86,61.64 -46.88,61.67 | v-63.03,76.75 -63.03,80.23 -62.99,80.27 | -63.37,49.97 -63.39,49.96 -63.39,40.88 -68.61,35.66 -68.61,28.92 -65.16,25.47 -57.76,25.47 -54.46,22.17 E$84.A
  Bottom 0.762: E$211.A 67.11,133.23 67.27,133.08
  Bottom 0.813: 67.27,133.08 67.27,157 57.51,166.76 -49.65,166.76 -53.03,163.38
  Bottom 1.016: 67.27,65.68 67.27,133.08
S$383
  Bottom 1.016: E$152.C 54.31,32.05 54.31,38.6 54.32,38.61 | E$94.1 49.12,38.53 49.2,38.61 | E$173.1 49.2,38.61 | 49.2,38.61 54.32,38.61 | 54.32,38.61 63.06,38.61 67.27,42.82 67.27,130.1
S$390
  Bottom 1.016: E$239.2 34.8,16.1 34.83,16.07
  Bottom 1.27: E$37.A 30.57,19.49 33.98,16.07 34.83,16.07 50.8,16.07 | E$171.A 61.03,32.03 61.03,19.73 57.37,16.07 50.8,16.07 | E$96.P$3 50.88,16.15 50.8,16.07
S$392
  Bottom 1.016: E$238.A 26.88,16.14 E$239.1
S$393
  Bottom 1.016: E$238.E 17.91,26.08 23.27,20.72 27.04,20.72 E$240.2
S$394
  Bottom 1.016: E$241.1 E$238.S

## Text on the board
Bottom: POWERTECH 2018
tValues: TX1 | NC | TX-EN | TX0 | RX0 | RX1 | RETCLK | CRS | 10uf | MDI0 | MDC | GND | GND | 104 | VCC | VCC | 104 | 10uf | 470/25 | 470/25 | 104 | 104 | 4K7 | 3K3 | 3K3 | FR107 | 10uf | FR107 | 104 | 104 | 104 | 1K2 | 1K2 | 472 | 471 | 472 | 471 | 8hz | 24C512 | 33K | 33K | 473 | 473 | 104 | 4K7 | 4K7 | 1K2 | 4K7 | 4K7 | 8hz | 104 | 1K2 | 1K2 | 47E | 10K | 47E | 10K | 47E | 47K | 47K | 104 | 10K | 10K | 103/1KV | 4.7E/1W | 4.7E/1W | 107 | 107 | 107 | 107 | 103/1KV | ULN2003 | 100/100 | 100/100 | 1K2 | 1K2 | 330E | 330E | 1K2 | 1K2 | 5K6 | 5K6 | 1000uf | UF5408 | UF5408 | 100uf | 3K3 | 3K3 | 10K | 75K